# Altium PCB PCB1.PcbDoc
Units mm, origin at the board's own origin, x right, y up, seen from the top; angles counter-clockwise.
Board outline 25.02 x 47.24 mm, 2 copper layers (Top Layer, Bottom Layer); 25 components, 27 nets, 74 pads, 5 vias.
Unrouted connection lines stored in the file: 2.
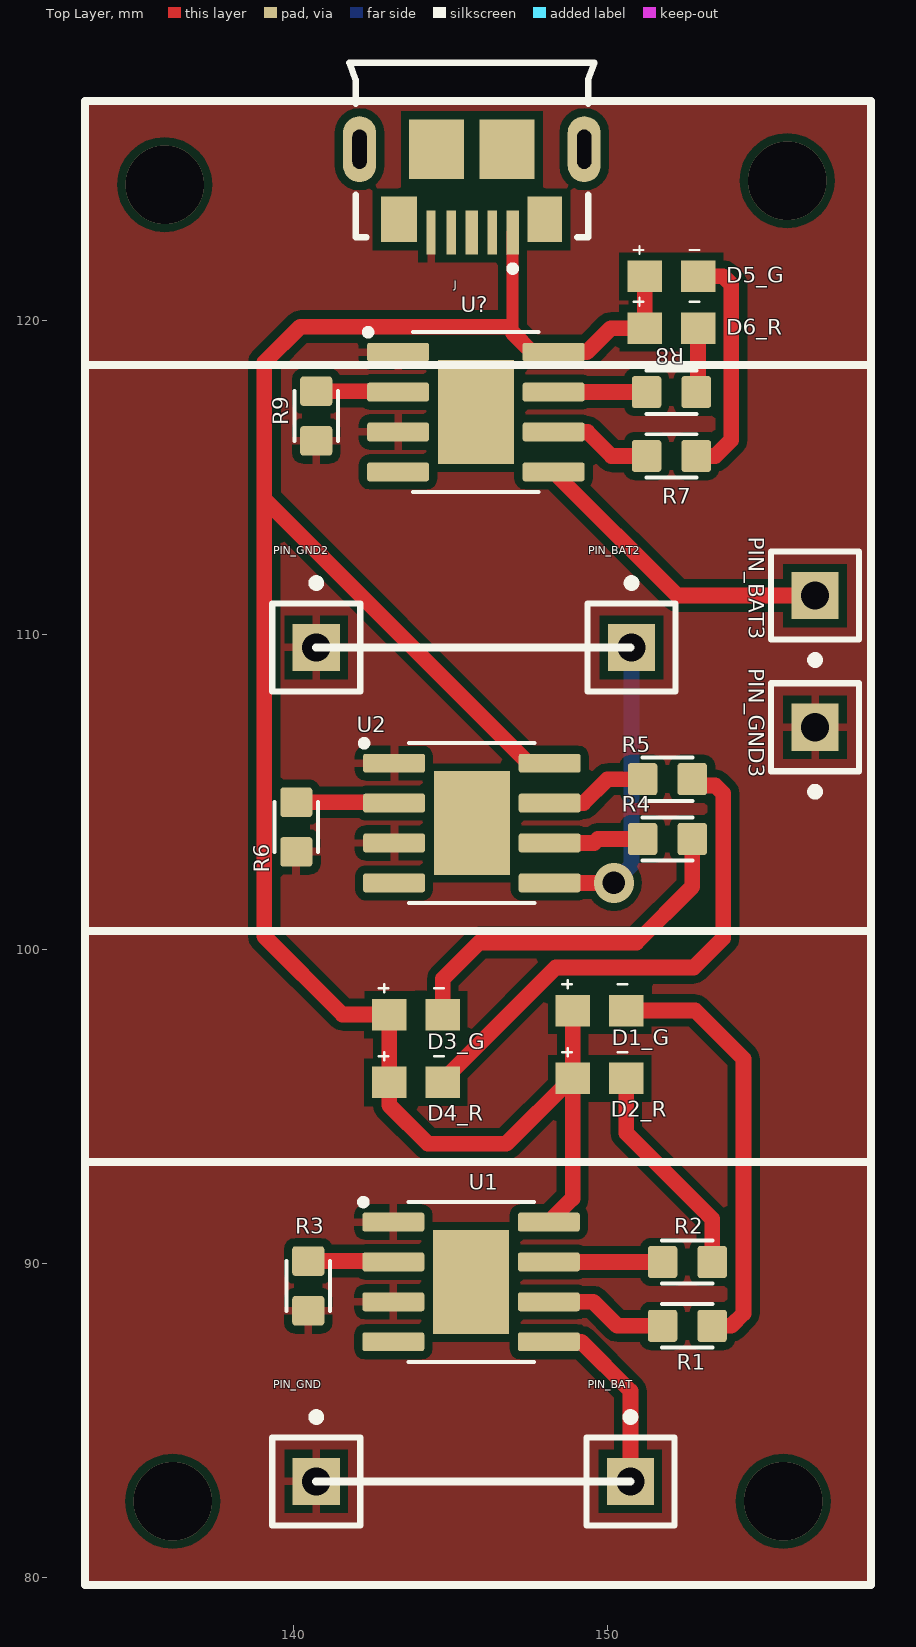
[diagram p0: Top Layer view]
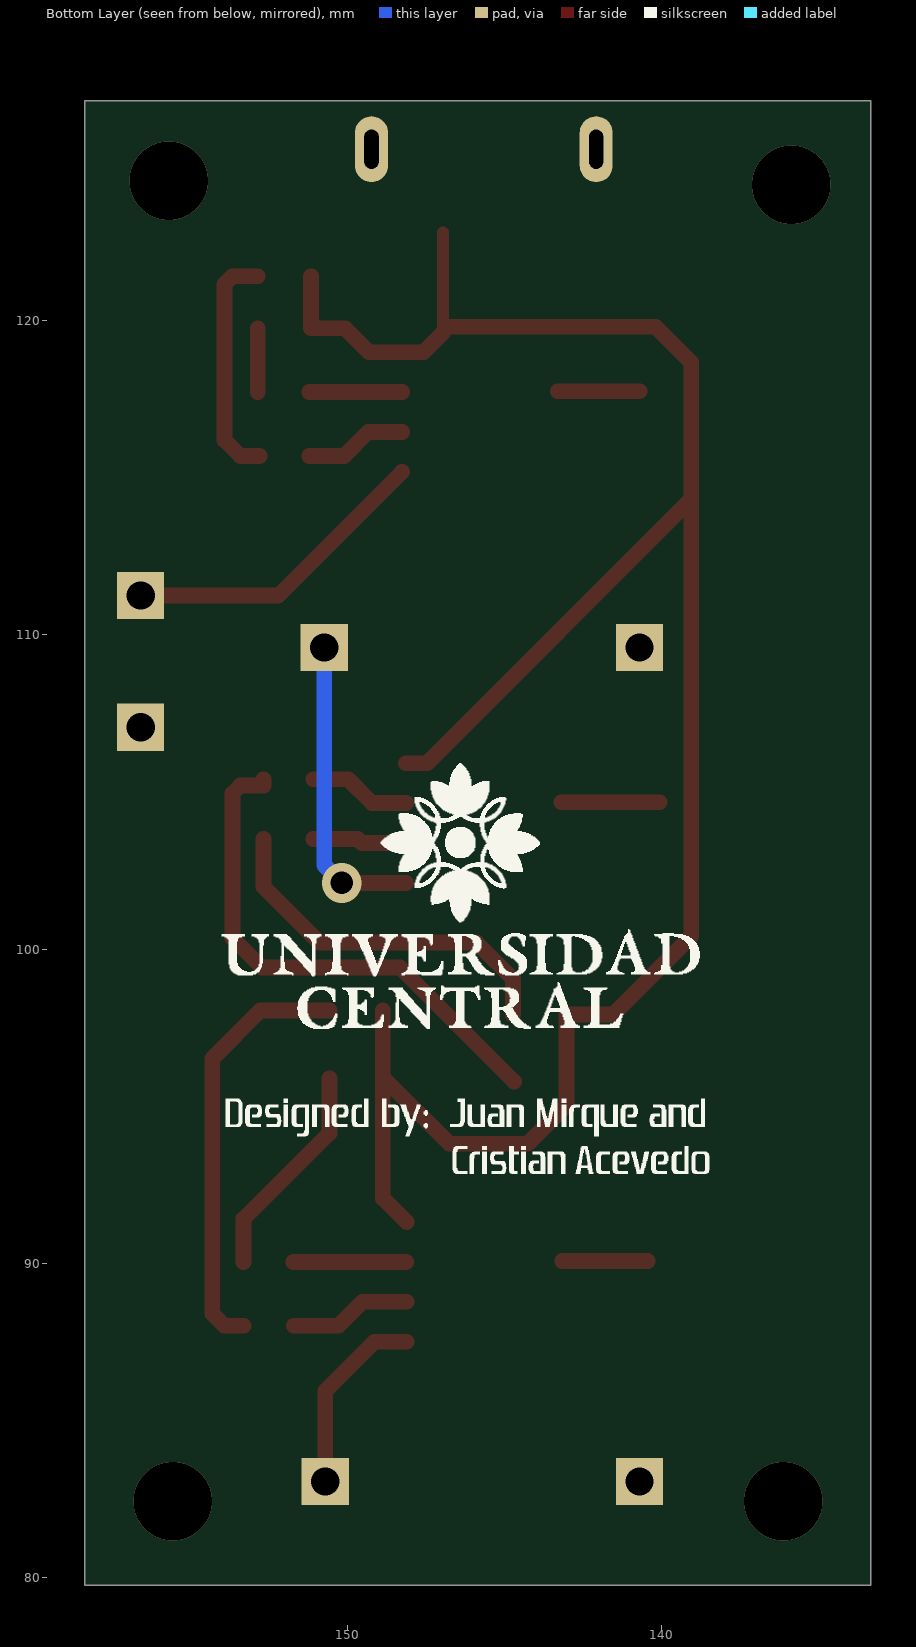
[diagram p1: Bottom Layer view, seen from below]
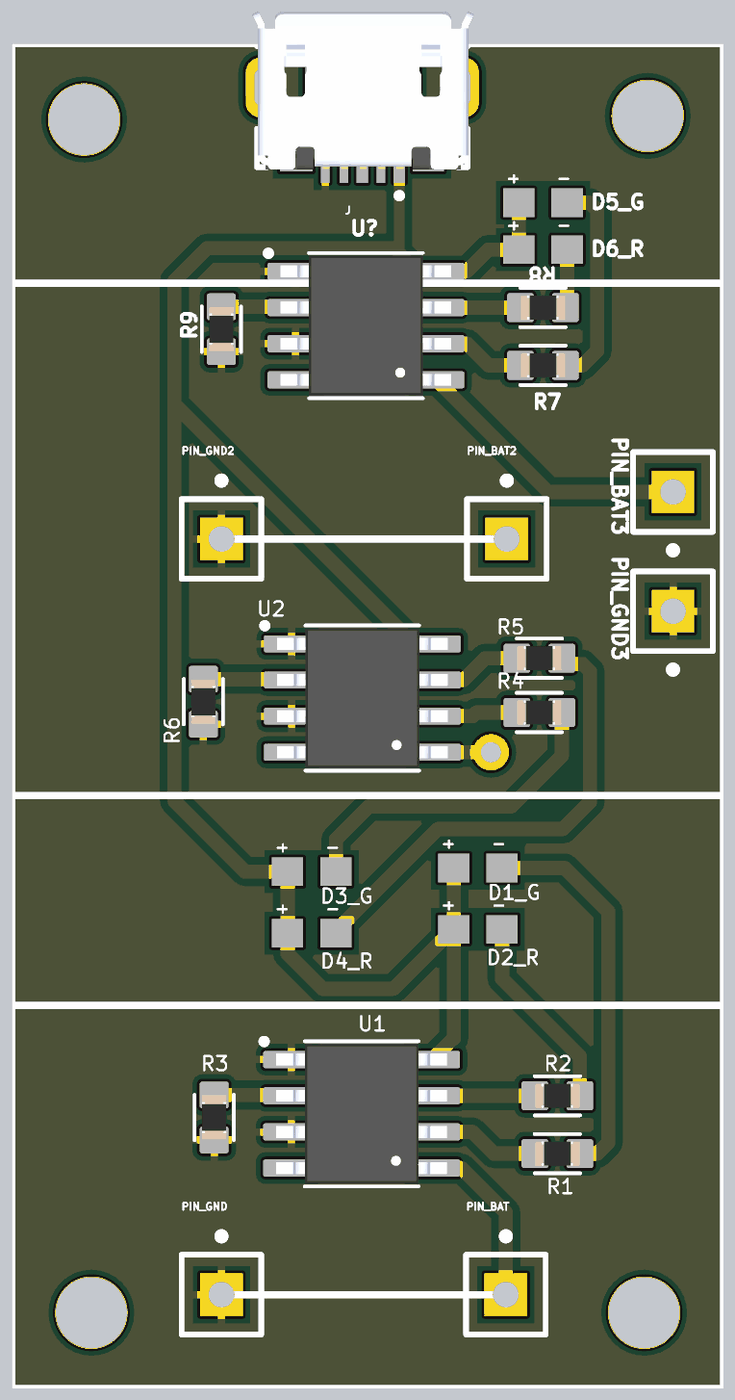
[diagram p2: 3D render of the assembled board from above, using the file's embedded part models]

## Layer stack, top to bottom
Top Solder: solder mask 0.0102, Solder Resist, Dk 3.5
Top Layer: signal copper 0.0356
Dielectric 1: dielectric 0.32, FR-4, Dk 4.8
Bottom Layer: signal copper 0.0356
Bottom Solder: solder mask 0.0102, Solder Resist, Dk 3.5

## Board outline
133.35,79.756 133.35,127 158.369,127 158.369,79.756

## Design rules (kind name [scope] priority, off if disabled: settings)
Clearance [All] p1: gap=0.254 ignorepadtopadclearanceinfootprint=FALSE except(0: Arc-Hole Track-Hole SMDPad-Hole THPad-Hole Via-Hole Fill-Hole Poly-Hole Region-Hole Text-Hole)
PolygonConnect [All] p1: connectstyle=Relief reliefconductorwidth=0.254 reliefentries=4 polygonreliefangle="90 Angle" airgapwidth=0.254
RoutingVias [All] p1: holewidth=0.711 width=1.27 viastyle="Through Hole" minholewidth=0.711 minwidth=1.27 maxholewidth=0.711 maxwidth=1.27
SolderMaskExpansion [All] p1: expansion=0.102 istentingtop=FALSE
Width [All] p1: maxlimit=0.5 minlimit=0.254 preferedwidth=0.5
30 further rules are at their usual default settings.

## Components (designator, comment, footprint, x,y, rotation, side; value= is the part's Value field where it differs from the comment)
D1_G "Green" 0603gree 149.733,98.044 r180 top
D2_R "Red" 0603red 149.733,95.885 r180 top
D3_G "Green" 0603gree 143.891,97.917 r180 top
D4_R "Red" 0603red 143.891,95.758 r180 top
D5_G "Green" 0603gree 152.019,121.412 r180 top
D6_R "Red" 0603red 152.019,119.761 r180 top
J "USB3075-30-A" GCT_USB3075-30-A 146.969,122.809 r180 top
PIN_BAT "Plug" PIN1 150.716,83.058 r0 top
PIN_BAT2 "Plug" PIN1 150.749,109.601 r0 top
PIN_BAT3 "Plug" PIN1 156.591,111.252 r180 top
PIN_GND "Plug" PIN1 140.716,83.058 r0 top
PIN_GND2 "Plug" PIN1 140.716,109.601 r0 top
PIN_GND3 "Plug" PIN1 156.591,107.061 r180 top
R1 "1k" RESC1608X50N 152.527,88.011 r0 top
R2 "1k" RESC1608X50N 152.527,90.043 r0 top
R3 "1k2" RESC1608X50N 140.462,89.281 r90 top
R4 "1k" RESC1608X50N 151.892,103.505 r0 top
R5 "1k" RESC1608X50N 151.892,105.41 r0 top
R6 "1k2" RESC1608X50N 140.081,103.886 r90 top
R7 "1k" RESC1608X50N 152.019,115.697 r0 top
R8 "1k" RESC1608X50N 152.019,117.729 r0 top
R9 "1k2" RESC1608X50N 140.716,116.967 r90 top
U1 "TP4056" SOP127P600X175-9N 145.645,89.41 r0 top
U2 "TP4056" SOP127P600X175-9N 145.669,104.013 r0 top
U? "TP4056" SOP127P600X175-9N 145.796,117.094 r0 top

## Footprints (in the part's own frame and the unit in brackets; to place one, negate y for a bottom-side part, rotate by r counter-clockwise, add the part's x,y. Pads: shape width x height; smd on the part's side, far side on the other; paste and mask are expansions set on the pad)
0603gree [mm]
  rect 1.1x1 smd: 1(-0.85,0) 2(0.85,0)
  silkscreen extent -0.89,-0.97 1.19,-0.71, body extent -0.8,-0.4 0.8,0.4, height 0.4
0603red [mm]
  rect 1.1x1 smd: 1(-0.85,0) 2(0.85,0)
  silkscreen extent -0.89,-0.97 1.19,-0.71, body extent -0.8,-0.4 0.8,0.4, height 0.4
GCT_USB3075-30-A [mm]
  rect 0.4x1.4 smd: 1(0,0) 3(1.3,0)
  rect 0.306x1.4 smd: 2(0.65,0)
  rect 0.3x1.4 smd: 4(1.95,0) 5(2.6,0)
  rect 1.1x1.45 smd: S1(-1.02,-0.42)
  rect 1.15x1.45 smd: S2(3.62,-0.42)
  rect 1.75x1.9 smd: S3(0.175,-2.65) S4(2.425,-2.65)
  oval 1.05x2.1 hole 0.45 slot 1.25 at 90 deg: S5(-2.275,-2.65) S6(4.875,-2.65)
  silkscreen extent -2.6,-5.4 5.2,1.25, body extent -2.63,-5.31 5.17,0.24, height 2.7
PIN1 [mm] "Connector; Plug"
  rect 1.5x1.5 hole 0.9: 1(0,0)
  silkscreen extent -1.4,-1.4 1.4,2.17
RESC1608X50N [mm]
  rrect20% 0.94x1.02 smd: 1(-0.79,0) 2(0.79,0)
  silkscreen extent -0.8,-0.69 0.8,0.69, body extent -0.78,-0.43 0.78,0.43, height 0.45
SOP127P600X175-9N [mm]
  rrect25% 1.97x0.6 smd: 1(-2.475,1.905) 2(-2.475,0.635) 3(-2.475,-0.635) 4(-2.475,-1.905) 5(2.475,-1.905) 6(2.475,-0.635) 7(2.475,0.635) 8(2.475,1.905)
  rect 2.413x3.302 smd paste-3: 9(0,0)
  silkscreen extent -3.53,-2.55 2,2.64, body extent -3,-2.45 3,2.45, height 1.75

## Part data
D1_G D2_R D3_G D4_R D5_G D6_R: library part LTST-C191KGKT, "Green 571nm LED Indication - Discrete 2V 0603 _1608 Metric_", Package="0603 Lite-On", Availability=Unavailable, MF="Lite-On Inc.", MP=LTST-C191KGKT, Price=None, SnapEDA_Link=https://www.snapeda.com/parts/LTST-C191KGKT/Lite-On%20Inc./view-part/48565/?ref=snap
J: "USB - micro B USB 2.0 Receptacle Connector 5 Position Surface Mount, Right Angle; Through Hole", Package=None, Digi-Key_Part_Number=2073-USB3075-30-ACT-ND, Digi-Key_Purchase_URL=https://www.digikey.com/product-detail/en/gct/USB3075-30-A/2073-USB3075-30-ACT-ND/9859705?utm_source=snapeda&utm_medium=aggregator&utm_campaign=symbol, MF="Global Connector Technology", MP=USB3075-30-A, SnapEDA_Link=https://www.snapeda.com/parts/USB3075-30-A/Global%20Connector%20Technology/view-part/229370/?ref=snap
R1 R2 R3 R4 R5 R6 R7 R8 R9: library part RP73D1J13RBTDG, "Res, Thin Film, 13r, 0.1%, 0.1w, 0603", Package="0603 TE Connectivity / AMP", Availability=Unavailable, MF="TE Connectivity", MP=RP73D1J13RBTDG, Price=None, SnapEDA_Link=https://www.snapeda.com/parts/RP73D1J13RBTDG/TE%20Connectivity/view-part/970906/?ref=snap, TE_purchase_URL=https://www.te.com/usa-en/product-RP73D1J13RBTDG.html?te_bu=Cor&te_type=disp&te_campaign=seda_glo_cor-seda-global-disp-prtnr-fy19-seda-model-bom-cta_sma-317_1&elqCampaignId=32493
U1 U2 U?: "Complete single cell Li-Ion battery with a constant current / constant voltage linear charger", Package=Package, Availability="No availability data", Check_prices=https://www.snapeda.com/parts/TP4056%20/NanJing%20Top%20Power%20ASIC%20Corp./view-part/2888426/?ref=eda, MF="NanJing Top Power ASIC Corp.", MP=TP4056, Price=None, SnapEDA_Link=https://www.snapeda.com/parts/TP4056%20/NanJing%20Top%20Power%20ASIC%20Corp./view-part/2888426/?ref=snap
PIN_BAT PIN_BAT2 PIN_BAT3 PIN_GND PIN_GND2 PIN_GND3: LatestRevisionDate=17-Jul-2002, LatestRevisionNote="Re-released for DXP Platform.", Publisher="Altium Limited"

## Via types
v1: diameter 2.5, hole 2.5, Top Layer to Bottom Layer, 4 vias
v2: diameter 1.27, hole 0.711, Top Layer to Bottom Layer, 1 vias

## Nets (pads, with @x,y where several pads share a name; then routed paths per layer and width w, separated by ;. In a path a pad name is that pad's centre, name@x,y a point inside that pad or via, vN(x,y) a via of type N, cw(c..) or ccw(c..) an arc to the next point about the centre after c; other vN are vias at no path point)
GND: J.5 PIN_GND2.1 PIN_GND3.1 PIN_GND.1 R3.1 R6.1 R9.1 U1.1 U1.3 U2.1 U2.3 U?.1 U?.3
NetC1_1: 
NetC1_2: 
NetC2_1: 
NetD1_G_1: D1_G.1 R1.2 | length 13.6
  Top Layer w0.5: D1_G.1 152.781,98.044 154.315,96.51 154.315,88.402 153.924,88.011 R1.2
NetD1_G_2: D1_G.2 D2_R.2 D3_G.2 D4_R.2 D5_G.2 D6_R.2 J.1 U1.8 U2.8 U?.8 | length 70.8
  Top Layer w0.38: 146.969,119.616 J.1
  Top Layer w0.5: 146.761,119.812 140.208,119.812 139.065,118.669 139.065,114.325 ; 146.969,119.616 147.586,118.999 U?.8 149.327,118.999 150.089,119.761 D6_R.2 D5_G.2 ; U1.8 148.859,92.054 ; U2.8 147.472,105.918 139.065,114.325 ; 148.883,92.052 D2_R.2 ; D1_G.2 D2_R.2 ; 139.065,114.325 139.065,100.406 141.554,97.917 D3_G.2 D4_R.2 143.041,95.033 144.272,93.802 146.761,93.802 148.844,95.885 D2_R.2
NetD2_R_1: D2_R.1 R2.2 | length 7
  Top Layer w0.5: D2_R.1 150.583,94.149 153.317,91.415 R2.2
NetD3_G_1: D3_G.1 R4.2 | length 11.8
  Top Layer w0.5: D3_G.1 144.741,99.047 145.904,100.21 150.908,100.21 152.682,101.984 R4.2
NetD4_R_1: D4_R.1 R5.2 | length 16.7
  Top Layer w0.5: D4_R.1@144.71,95.789 148.336,99.416 152.73,99.416 153.67,100.355 153.67,104.953 153.416,105.207 152.682,105.207 R5.2
NetD5_G_1: D5_G.1 R7.2 | length 7.4
  Top Layer w0.5: R7.2 153.416,115.697 153.924,116.205 153.924,121.158 153.67,121.412 D5_G.1
NetD6_R_1: D6_R.1 R8.2 | length 2
  Top Layer w0.5: R8.2@152.869,117.729 D6_R.1
NetIC1_1: 
NetIC1_2: 
NetIC1_3: 
NetPIN_BAT2_1: PIN_BAT2.1 U2.5 | length 9.8
  Top Layer w0.5: U2.5 v2(150.19,102.108)
  Bottom Layer w0.5: v2(150.19,102.108) 150.749,102.667 PIN_BAT2.1
NetPIN_BAT3_1: PIN_BAT3.1 U?.5 | length 10
  Top Layer w0.5: U?.5 152.208,111.252 PIN_BAT3.1
NetPIN_BAT_1: PIN_BAT.1 U1.5 | length 6.1
  Top Layer w0.5: U1.5 149.125,87.505 ; 149.149,87.503 150.716,85.936 PIN_BAT.1
NetQ1_1: 
NetR1_1: R1.1 U1.6 | length 3.9
  Top Layer w0.5: U1.6 149.531,88.775 150.293,88.013 R1.1@151.713,88.013
NetR2_1: R2.1 U1.7 | length 3.6
  Top Layer w0.5: U1.7@148.144,90.043 R2.1
NetR3_2: R3.2 U1.2 | length 2.7
  Top Layer w0.5: R3.2 U1.2@143.17,90.071
NetR4_1: R4.1 U2.6 | length 3
  Top Layer w0.5: U2.6 149.555,103.378 149.682,103.505 R4.1
NetR5_1: R5.1 U2.7 | length 3.3
  Top Layer w0.5: U2.7 149.225,104.648 149.987,105.41 R5.1
NetR6_2: R6.2 U2.2 | length 3.1
  Top Layer w0.5: R6.2 U2.2@143.194,104.676
NetR7_1: R7.1 U?.6 | length 3.3
  Top Layer w0.5: U?.6 149.352,116.459 150.114,115.697 R7.1
NetR8_1: R8.1 U?.7 | length 3
  Top Layer w0.5: U?.7 R8.1
NetR9_2: R9.2 U?.2 | length 2.6
  Top Layer w0.5: R9.2 U?.2@143.321,117.757
pads on no net: J.2 J.3 J.4 J.S1 J.S2 J.S3 J.S4 J.S5 J.S6 U1.4 U1.9 U2.4 U2.9 U?.4 U?.9
copper on no net:
  other v1: 136.144,82.423 155.575,82.423 135.89,124.333 155.702,124.46

## Polygon pours and split planes (outlines as drawn)
GND on Top Layer "GND_L01_P000" (solid, pour order 0): 133.477,127 158.242,127 158.242,79.883 133.35,79.883

## Silkscreen, mask and mechanical layers (free items; w line width, h text height)
Top Overlay:
  lines w0.254: 140.716,83.058 150.716,83.058 ; 140.716,109.601 150.716,109.601 ; 133.35,79.756 158.369,79.756 ; 133.35,79.756 133.35,93.218 158.369,93.218 158.369,79.756 ; 133.35,79.756 158.369,79.756 ; 133.35,79.756 133.35,127 158.369,127 158.369,79.756 ; 133.35,100.584 158.369,100.584 158.369,118.584 133.35,118.584 133.35,100.584
Bottom Overlay:
  drawing of 64 lines, arcs and shapes, not listed

## Text inside footprints (layer, text, board x,y; h text height)
J: Mechanical 13 "PCB EDGE" at 141.253,126.864 h0.41 r180